# Altium PCB PCB Smart Garden.PcbDoc
Units mil, origin at the board's own origin, x right, y up, seen from the top; angles counter-clockwise.
Board outline 2320.55 x 3202.57 mil, 2 copper layers (Top Layer, Bottom Layer); 16 components, 47 nets, 98 pads, 24 vias.
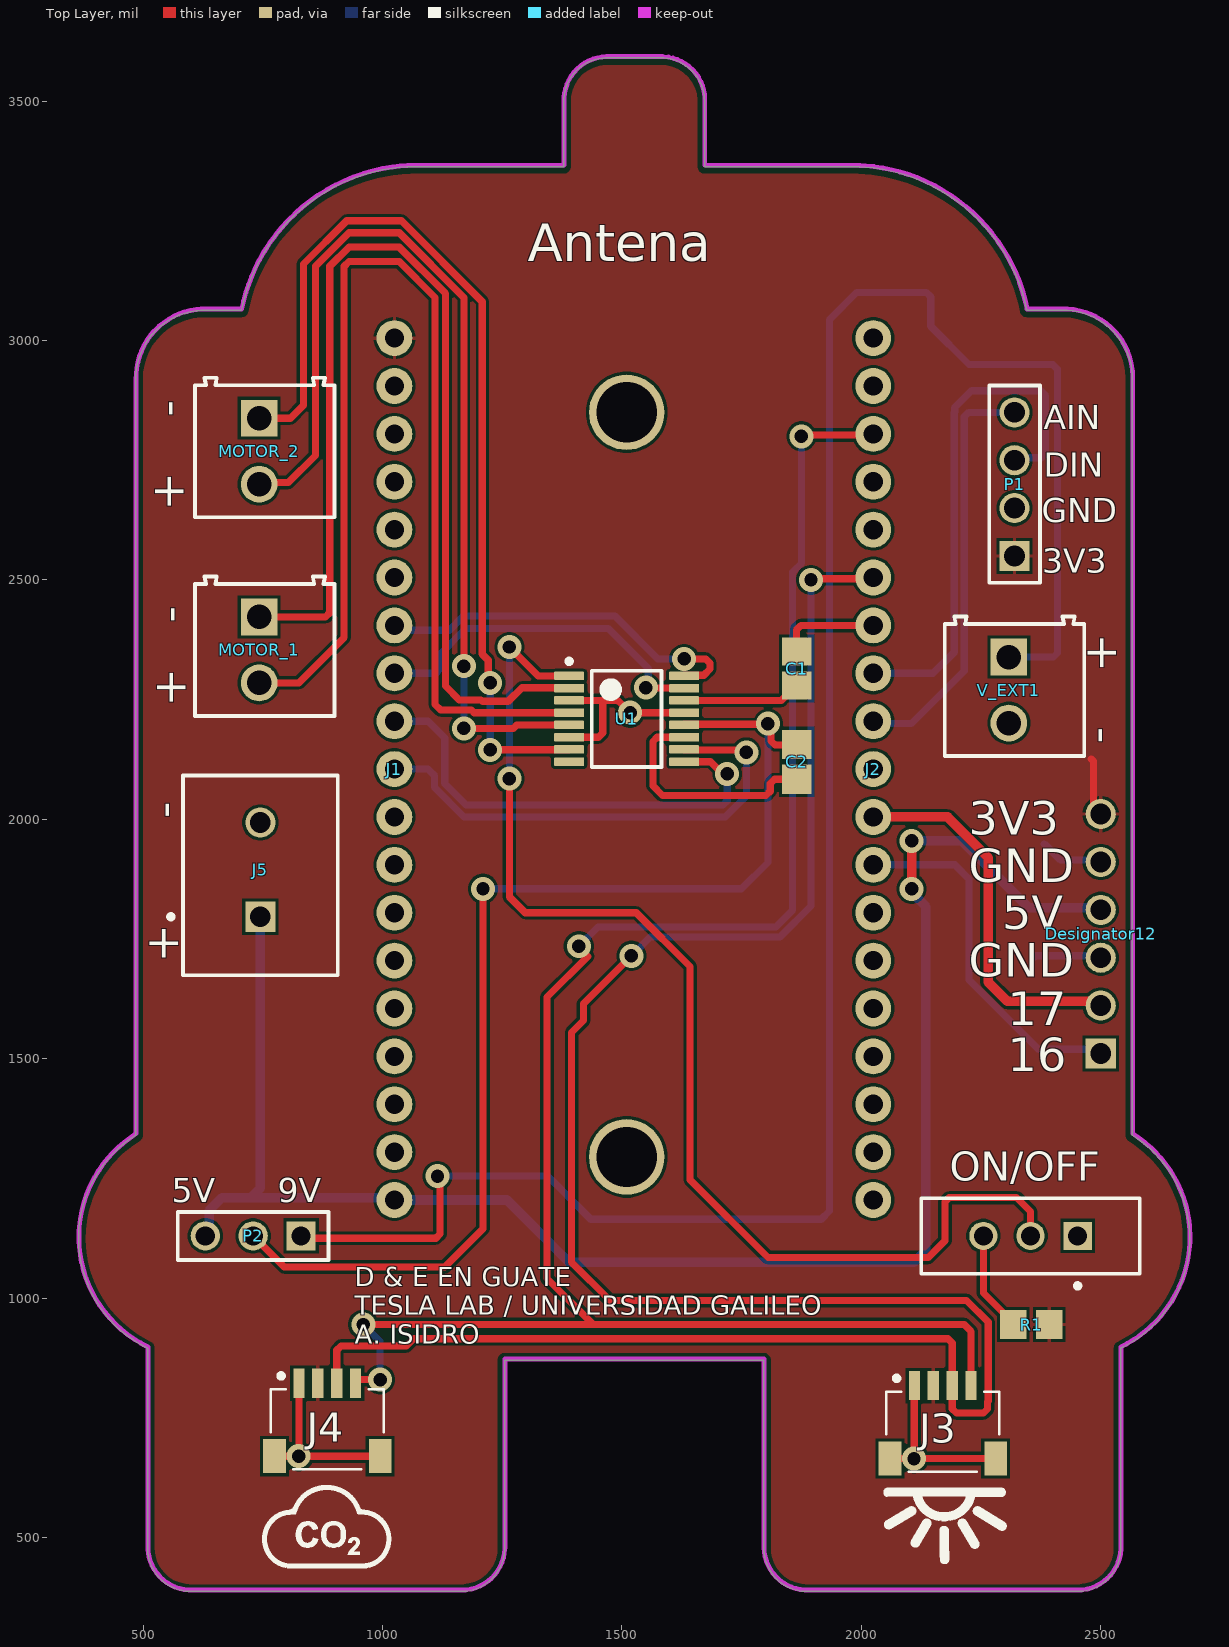
[diagram p0: Top Layer view]
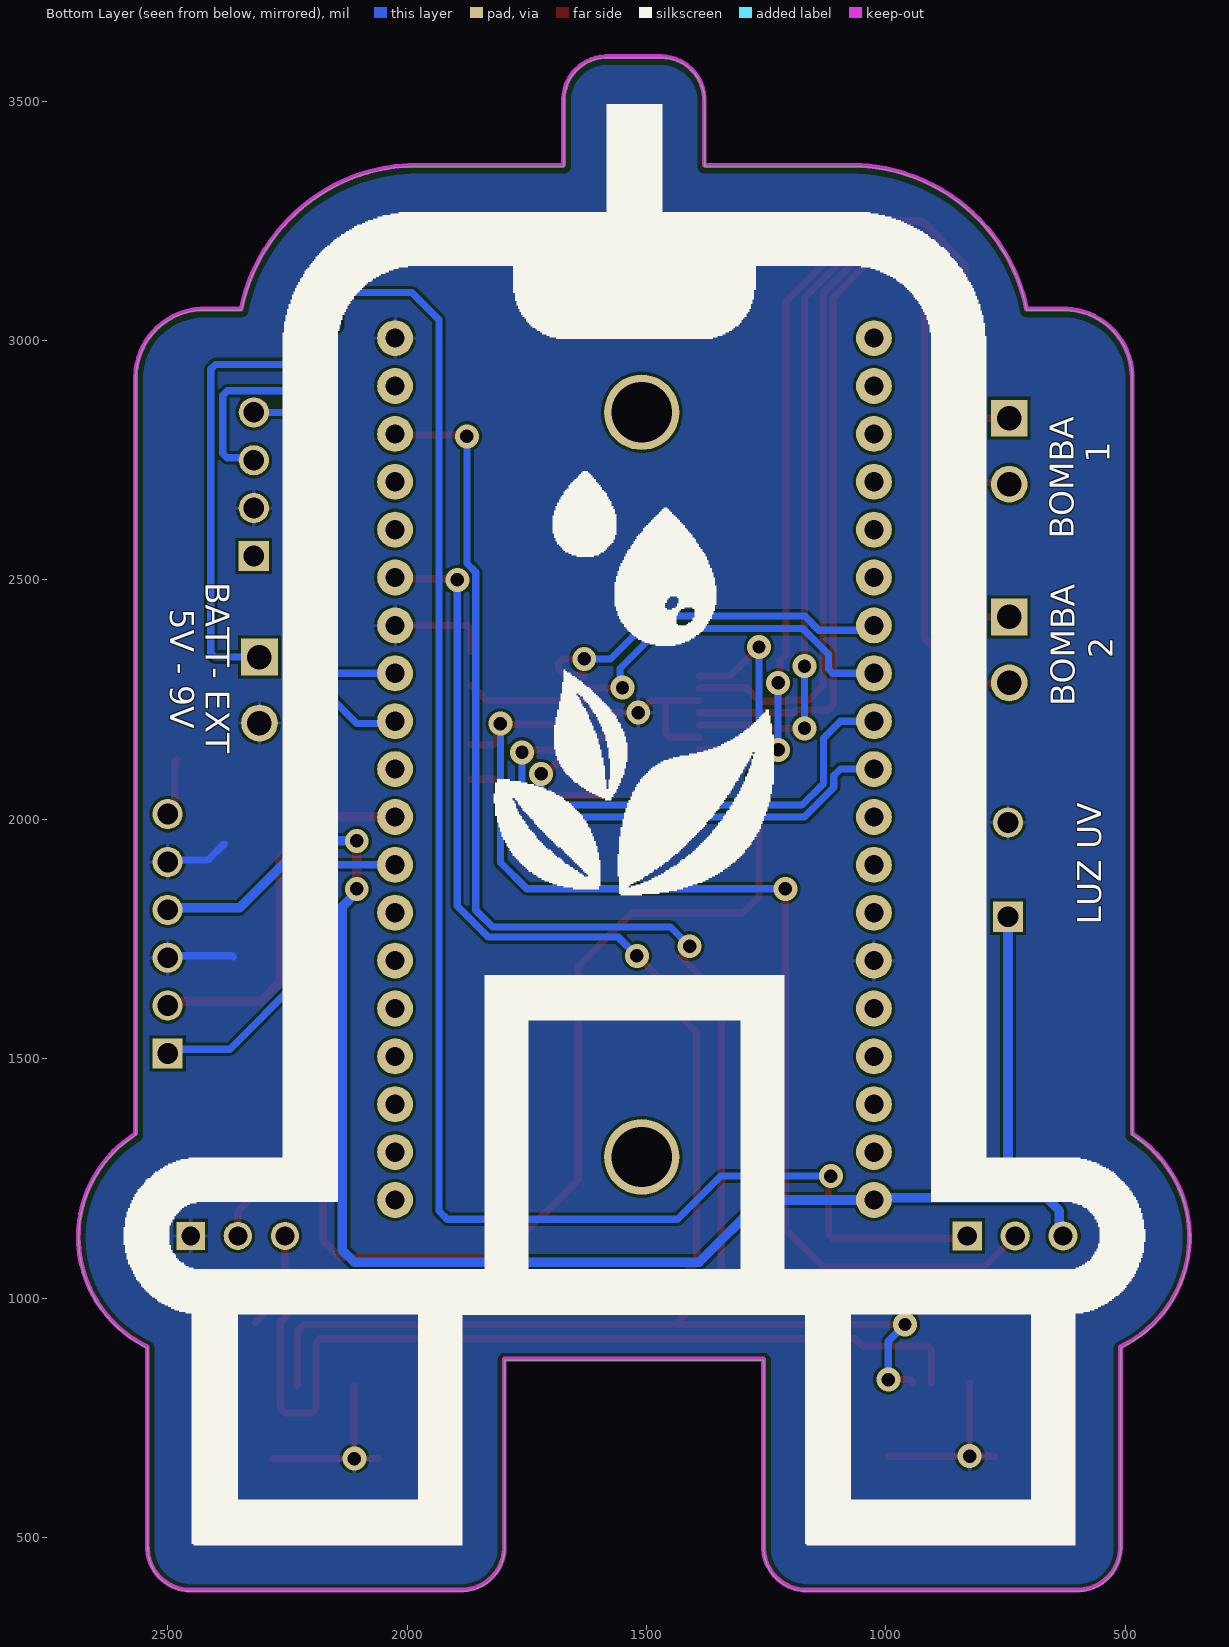
[diagram p1: Bottom Layer view, seen from below]
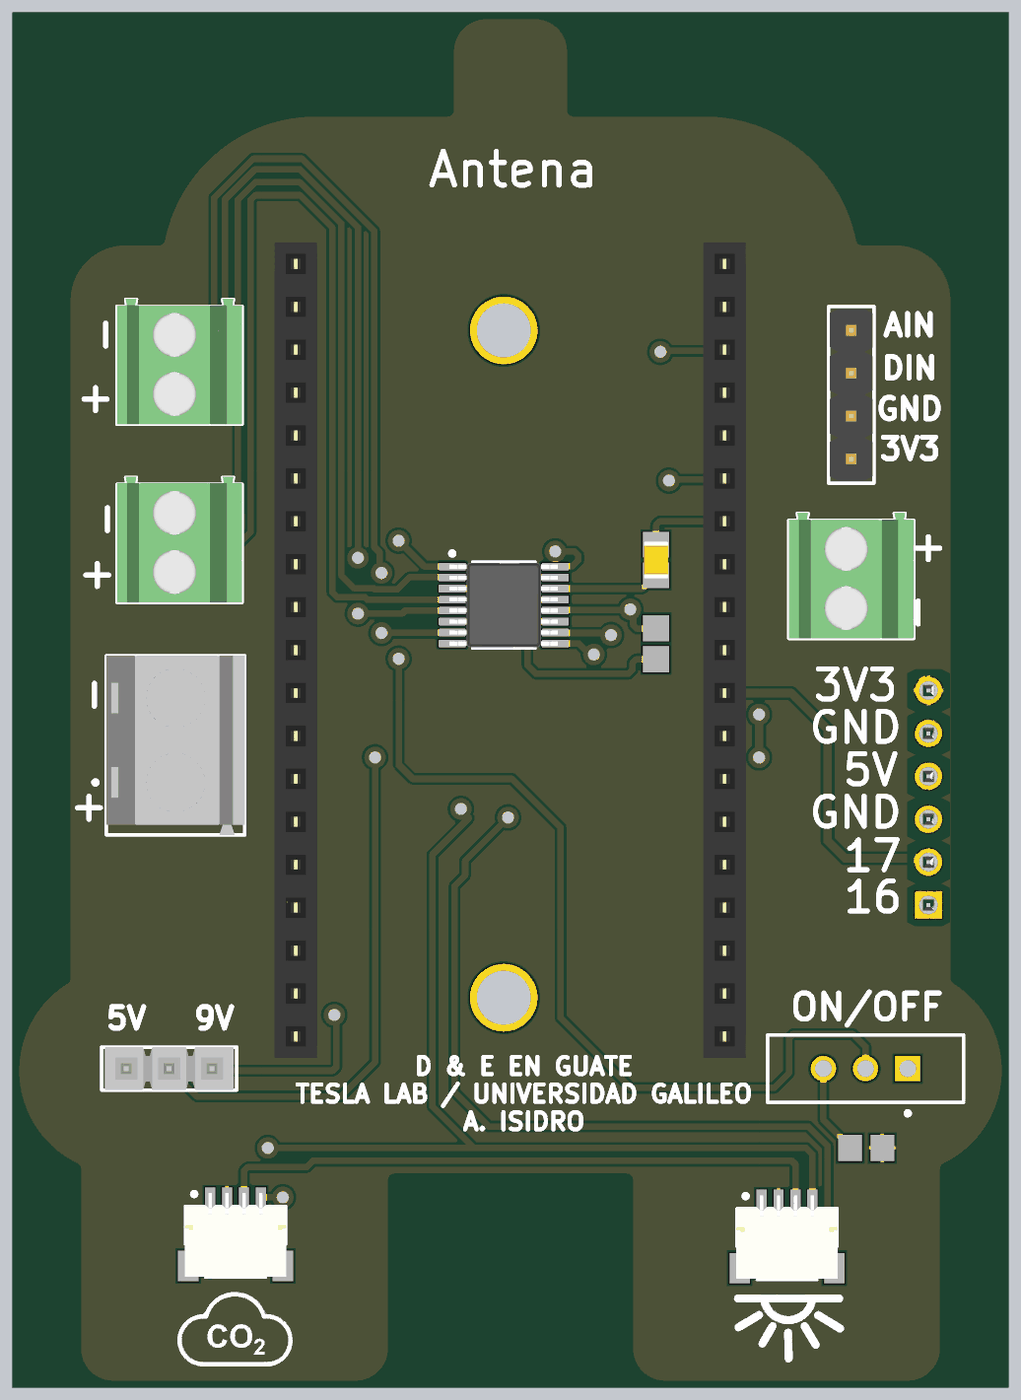
[diagram p2: 3D render of the assembled board from above, using the file's embedded part models]

## Layer stack, top to bottom
Top Solder: solder mask 0.4, Solder Resist, Dk 3.5
Top Layer: signal copper 1.4
Dielectric 1: dielectric 12.6, FR-4, Dk 4.8
Bottom Layer: signal copper 1.4
Bottom Solder: solder mask 0.4, Solder Resist, Dk 3.5

## Board outline
509.54,477.91 509.54,895.71 cw(c620.7,1125.58) 366.23,1104.66 cw(c621.18,1125.15) 365.41,1125.17 cw(c623.05,1125.16) 365.46,1130.33 cw(c621.18,1125.22) 366.23,1145.66 cw(c617.36,1125.59) 380.8,1212.26 cw(c618.41,1125.16) 398.82,1250.95 cw(c622.08,1122.87) 485,1340.72 485,2920 cw(c630.57,2920.01) 485.18,2927.31 cw(c628.24,2919.98) 610.69,3062.15 cw(c628.11,2919.27) 620.66,3063.01 cw(c628.2,2917.74) 628.21,3063.21 705.6,3063.21 cw(c1069.22,2990.28) 733.23,3147.28 cw(c1073.95,2987.82) 848.1,3288.67 cw(c1071.66,2991.55) 1020.34,3359.82 cw(c1071.81,2989.52) 1051.04,3362.81 cw(c1072.04,2985.63) 1072.07,3363.39 1378.71,3363.39 1378.71,3499.92 cw(c1470.47,3499.92) 1378.82,3504.53 cw(c1469,3499.91) 1457.94,3589.53 cw(c1468.93,3499.43) 1464.23,3590.08 cw(c1468.98,3498.52) 1468.98,3590.2 1582.39,3590.2 cw(c1582.39,3498.59) 1587,3590.08 cw(c1582.38,3499.9) 1672,3510.97 cw(c1581.96,3499.99) 1672.54,3504.68 cw(c1581,3499.93) 1672.67,3499.92 1672.67,3363.39 1979.29,3363.39 1985.25,3363.35 cw(c1979.36,2986.76) 2008.33,3362.28 cw(c1979.92,2992.42) 2115.25,3337.8 cw(c1977.64,2987.95) 2295.49,3188.71 cw(c1981.39,2990.05) 2345.77,3063.21 2423.16,3063.21 cw(c2423.16,2917.64) 2430.47,3063.03 cw(c2423.14,2919.97) 2565.3,2937.52 cw(c2422.42,2920.09) 2566.17,2927.55 cw(c2420.9,2920.01) 2566.36,2920 2566.36,1340.72 cw(c2429.14,1122.69) 2643.88,1265.01 cw(c2433.55,1125.49) 2683.83,1158.12 cw(c2431.9,1125.33) 2685.6,1138.7 cw(c2429.3,1125.18) 2685.96,1125.17 cw(c2429.78,1125.15) 2685.74,1114.72 cw(c2432.55,1124.96) 2674.94,1051.06 cw(c2430.32,1125.95) 2590.24,926.27 cw(c2431.15,1124.71) 2541.82,895.71 2541.82,477.91 cw(c2450.22,477.9) 2541.7,473.3 cw(c2451.52,477.92) 2462.59,388.3 cw(c2451.6,478.43) 2456.3,387.75 cw(c2451.54,479.45) 2451.54,387.63 1886.55,387.63 cw(c1886.54,479.39) 1881.94,387.75 cw(c1886.56,477.93) 1796.94,466.86 cw(c1887.08,477.85) 1796.39,473.15 cw(c1888.09,477.91) 1796.27,477.91 1796.27,870.42 1255.1,870.42 1255.1,477.91 cw(c1163.49,477.9) 1254.98,473.3 cw(c1164.8,477.92) 1175.86,388.3 cw(c1164.88,478.42) 1169.58,387.75 cw(c1164.82,479.45) 1164.82,387.63 599.82,387.63 cw(c599.81,479.39) 595.21,387.75 cw(c599.83,477.93) 510.21,466.86 cw(c600.35,477.85) 509.66,473.15 cw(c601.36,477.91)

## Design rules (kind name [scope] priority, off if disabled: settings)
BoardOutlineClearance [All] p1: gap=15 ignorepadtopadclearanceinfootprint=FALSE
Clearance [All] p1: gap=6 ignorepadtopadclearanceinfootprint=FALSE except(0: Arc-Hole Track-Hole SMDPad-Hole THPad-Hole Via-Hole Fill-Hole Poly-Hole Region-Hole Text-Hole)
ComponentClearance [All] p1: gap=1 collisioncheckmode=3 verticalgap=-30 showdistances=FALSE
DiffPairsRouting [All] p1: maxlimit=393.7 minlimit=6 mostfreqgap=8 toplayer_minwidth=6 toplayer_maxwidth=15 toplayer_prefwidth=8 bottomlayer_minwidth=6 bottomlayer_maxwidth=15 bottomlayer_prefwidth=8 maxuncoupledlength=500
HoleSize [All] p1: absolutevalues=TRUE maxlimit=265 minlimit=13 maxpercent=80.000 minpercent=20.000
HoleToHoleClearance [All] p1: gap=10 allowstackedmicrovias=FALSE
MinimumAnnularRing [All] p1: minimumring=7
MinimumSolderMaskSliver [All] p1: minsoldermaskwidth=0
PlaneClearance [All] p1: clearance=10
PlaneConnect [All] p1: planeconnectstyle=Direct reliefexpansion=16 reliefentries=4 reliefconductorwidth=6 reliefairgap=6
PolygonConnect [All] p1: connectstyle=Relief reliefconductorwidth=8 reliefentries=4 polygonreliefangle="90 Angle" airgapwidth=6
RoutingCorners [All] p1: cornerstyle=45-Degree minsetback=49.21 maxsetback=49.21
RoutingVias [All] p1: holewidth=15 width=30 viastyle="Through Hole" minholewidth=13 minwidth=27 maxholewidth=100 maxwidth=114
SilkToSilkClearance [All] p1: silktosilkclearance=0
SilkToSolderMaskClearance [IsPad] p1: minsilkscreentomaskgap=6 clearancetoexposedcopper=TRUE
SolderMaskExpansion [All] p1: expansion=2.95 istentingtop=FALSE
Width [All] p1: maxlimit=400 minlimit=6 preferedwidth=15
20 further rules are at their usual default settings.

## Classes and differential pairs
component class SM_Balam_22: a J1 J2 J4 J5 P1
component class BOMBA_AGUA: C1 C2 MOTOR_1 MOTOR_2 ON/OFF P2 R1 U1 V_EXT1

## Components (designator, comment, footprint, x,y, rotation, side; value= is the part's Value field where it differs from the comment)
C1 "0805ZD225KAT2A" CAPC2013X140X50ML20T25 1865,2315 r90 top
C2 "0.1 uF" CAPC2013X94X50ML20T25 1865,2120 r90 top
Designator12 "Comment" 61300611121 2500,1761.02 r90 top
J1 "PH1-19-UA" "PH1-19-UA - SOCKET" 1025,3005 r270 top locked
J2 "PH1-19-UA" "PH1-19-UA - SOCKET" 2025,3005 r270 top locked
J3 "SM04B-SRSS-TB(LF)(SN)" JST_SM04B-SRSS-TB(LF)(SN) 2170.24,817.56 r0 top
J4 "SM04B-SRSS-TB(LF)(SN)" JST_SM04B-SRSS-TB(LF)(SN) 884.76,822.56 r0 top
J5 "282836-2" TECO-282836-2_V 745,1895 r90 top
MOTOR_1 "691214110002" 691214110002 754.25,2353.9 r270 top
MOTOR_2 "691214110002" 691214110002 754.25,2768.78 r270 top
ON/OFF "EG1218" ESWI-EG1218_V 2353.43,1130 r180 top (schematic designator ON/OFF1)
P1 "61300411121" 61300411121 2320,2700 r90 top
P2 "TSW-103-07-F-S" SMTC-TSW-103-07-X-S 830,1130 r180 top
R1 "ERA6AEB473V" RESC2013X60X40ML20T25 2355,945 r0 top
U1 "DRV8833PW" PW0016A_M 1510,2210 r0 top
V_EXT1 "691214110002" 691214110002 2320,2270 r270 top

## Footprints (in the part's own frame and the unit in brackets; to place one, negate y for a bottom-side part, rotate by r counter-clockwise, add the part's x,y. Pads: shape width x height; smd on the part's side, far side on the other; paste and mask are expansions set on the pad)
61300411121 [mm] "Pin Header, pitch 2.54 mm, THT, Vertical, single row, 4p"
  rect 1.6x1.6 hole 1.1: 1(-3.81,0)
  round 1.6 hole 1.1: 2(-1.27,0) 3(1.27,0) 4(3.81,0)
  silkscreen extent -5.23,-1.35 5.23,1.35, body extent -5.08,-1.27 5.08,1.27, height 8.57
61300611121 [mm] "Pin Header, pitch 2.54 mm, THT, Vertical, single row, 6p"
  rect 1.6x1.6 hole 1.1: 1(-6.35,0)
  round 1.6 hole 1.1: 2(-3.81,0) 3(-1.27,0) 4(1.27,0) 5(3.81,0) 6(6.35,0)
  body extent -7.62,-1.27 7.62,1.27, height 8.57
691214110002 [mm] "3.50 mm Horizontal Entry Modular, 2p"
  rect 1.95x1.95 hole 1.3: 1(-1.75,-0.3)
  round 1.95 hole 1.3: 2(1.75,-0.3)
  silkscreen extent -3.9,-3.7 3.5,3.7, body extent -3.95,-3.7 3.5,3.7, height 8.55
CAPC2013X94X50ML20T25 [mm] "Chip Capacitor, 2-Leads, Body 2.01x1.25mm, IPC Low Density"
  rect 1.55x1.55 smd: 1(-0.925,0) 2(0.925,0)
  body extent -1.1,-0.72 1.11,0.72, height 0.94
CAPC2013X140X50ML20T25 [mm] "Chip Capacitor, 2-Leads, Body 2.2x1.45mm, IPC Low Density"
  rect 1.5x1.55 smd: 1(-0.9,0) 2(0.9,0)
  body extent -1.1,-0.72 1.1,0.72, height 1.4
ESWI-EG1218_V [mm] "THD, 3-Leads, Body 11.6x4mm, Pitch 2.5mm"
  rect 1.5x1.5 hole 1: 1(-2.5,0)
  round 1.5 hole 1: 2(0,0) 3(2.5,0)
  silkscreen extent -5.8,-2 5.8,2.77, body extent -5.8,-2 5.8,2, height 7.4
JST_SM04B-SRSS-TB(LF)(SN) [mm]
  rect 0.6x1.55 smd: 1(-1.5,0) 2(-0.5,0) 3(0.5,0) 4(1.5,0)
  rect 1.2x1.8 smd: S1(-2.8,-3.875) S2(2.8,-3.875)
  silkscreen extent -3,-4.57 3,0.48, body extent -3,-4.5 3,0.45, height 2.98
"PH1-19-UA - SOCKET" [mm] "Connector Header Through Hole 19 position 0.100\" (2.54mm)"
  round 1.905 hole 1.02: 1(0,0) 2(2.54,0) 3(5.08,0) 4(7.62,0) 5(10.16,0) 6(12.7,0) 7(15.24,0) 8(17.78,0) 9(20.32,0) 10(22.86,0) 11(25.4,0) 12(27.94,0) 13(30.48,0) 14(33.02,0) 15(35.56,0) 16(38.1,0) 17(40.64,0) 18(43.18,0) 19(45.72,0)
  body extent -1.27,-1.27 46.99,1.27, height 7
PW0016A_M [mm] "SOP, 16-Leads, Body 5.1x4.5mm, Pitch 0.65mm, IPC Low Density"
  rrect22% 1.6x0.45 smd: 1(-3.05,2.275) 2(-3.05,1.625) 3(-3.05,0.975) 4(-3.05,0.325) 5(-3.05,-0.325) 6(-3.05,-0.975) 7(-3.05,-1.625) 8(-3.05,-2.275) 9(3.05,-2.275) 10(3.05,-1.625) 11(3.05,-0.975) 12(3.05,-0.325) 13(3.05,0.325) 14(3.05,0.975) 15(3.05,1.625) 16(3.05,2.275)
  silkscreen extent -3.17,-2.55 1.85,3.17, body extent -3.21,-2.5 3.21,2.5, height 1
RESC2013X60X40ML20T25 [mm] "Chip Resistor, 2-Leads, Body 2.00x1.25mm, IPC Low Density"
  rect 1.4x1.55 smd: 1(-0.95,0) 2(0.95,0)
  body extent -1.1,-0.72 1.1,0.72, height 0.6
SMTC-TSW-103-07-X-S [mm] ".025 SQ Post Terminal Strip Assembly, 1x3 Pins, Vertical, 2.54mm Pitch, Male"
  rect 1.55x1.55 hole 1.02: 1(0,0)
  round 1.55 hole 1.02: 2(2.54,0) 3(5.08,0)
  silkscreen extent -1.46,-1.27 6.54,1.27, body extent -1.27,-1.27 6.35,1.27, height 8.38
TECO-282836-2_V [mm] "Female Header, Pitch 5mm, 1 x 2 Position, Height 10mm"
  rect 1.6x1.6 hole 1.1: 1(-2.5,0)
  round 1.6 hole 1.1: 2(2.5,0)
  silkscreen extent -5.6,-4.1 5,4.87, body extent -5.6,-4.1 5,4.1, height 10

## Part data
C1: library part CMP-2000-05810-1, "Chip Capacitor, 2.2 uF, +/- 10%, 10 V, -55 to 85 degC, 0805 (2012 Metric), RoHS, Tape and Reel", Capacitance=2.2µF, Case Size/Dimension=0805, Dielectric=X5R, Manufacturer=AVX, Package Description="2-Pin Surface Mount Device, Body 2.01 x 1.25 mm", Rated Voltage=10V, Tolerance (%)=±10%, Datasheet URL=http://datasheets.avx.com/cx5r.pdf, Datasheet Version=05/2016, Manufacturer URL=http://www.avx.com/, Mounting Technology=SurfaceMount, Package Reference=0805
C2: library part CMP-2000-05016-1, "Chip Capacitor, Ceramic, 0.1 uF, 10%, 50 V, 0805, RoHS, Tape and Reel", Capacitance=100nF, Case Size/Dimension=0805, Dielectric=X7R, Manufacturer=AVX, Rated Voltage=50V, Tolerance (%)=±10%, Datasheet URL=http://www.farnell.com/datasheets/319609.pdf, Datasheet Version=Sep-07, Manufacturer URL=http://www.avx.com/
J1 J2: "Connector Header Through Hole 19 position 0.100\" (2.54mm)", Supplier Part Number 1=2057-PH1-19-UA-ND, Supplier 1=Digi-Key
J3 J4: "Connector Header Surface Mount, Right Angle 4 position 0.039 _1.00mm_", Package=None, Availability=Unavailable, MF="JST Sales", MP=SM04B-SRSS-TB_LF__SN_, Price=None, SnapEDA_Link=https://www.snapeda.com/parts/SM04B-SRSS-TB%28LF%29%28SN%29/JST%20Sales%20America%20Inc./view-part/557466/?ref=snap
J5: library part CMP-1684-00017-1, "Female Header, Pitch 5 mm, 1 x 2 Position, Height 10 mm, Tail Length 3.5 mm, Rohs, Bulk", Color=Green, Current=13.5A, Manufacturer="TE Connectivity", Package Description="Female Header, Pitch 5 mm, 1 x 2 Position, Height 10 mm, Tail Length 3.5 mm", Package Reference=THD, Standard Package=300, Voltage=300V, 3D Model=282836-2.pdf, Category=Connectors,Interconnects, Clamp Material - Plating=Brass-NickelPlated, Contact Material - Plating=Brass-TinPlated, Datasheet URL=http://www.te.com.cn/commerce/DocumentDelivery/DDEController?Action=showdoc&DocId=Catalog+Section%7F1308389_EUROSTYLE_TERMINAL_BLOCKS%7F0607%7Fpdf%7FEnglish%7FENG_CS_1308389_EUROSTYLE_TERMINAL_BLOCKS_0607.pdf%7F282836-2, Dynamic Catalog=BuchananSeries, Family=TerminalBlocks-WiretoBoard, Featured Product=EurostyleTerminalBlockConnectors, Features=Interlocking(Side), Housing Material=Polyamide(PA66),Nylon6/6, Manufacturer URL=http://www.te.com, Mating Orientation=HorizontalwithBoard, Mounting Type=ThroughHole, Number of Levels=1, Other Names="5ULV-02B / A98076", Packaging=Bulk, Pitch="0.197\"(5.00mm)", Positions Per Level=2, Product Training Modules=Wire-to-BoardEurostyleTerminalBlocks, RoHS Information=282836-2StatementofCompliance, Screw Material - Plating=Brass-NickelPlated, Screw Thread=M3, Series=Buchanan, Torque - Screw=0.68Nm(6Lb-In), Wire Gauge=16-30AWG, Wire Termination=Screw-RisingCageClamp
MOTOR_1 MOTOR_2 V_EXT1: library part CMP-1502-02464-1, "Serie 2141 - 3.50 mm Horizontal Entry Modular with Rising Cage Clamp WR-TBL, 2 pin", Manufacturer="Wurth Elektronik", Operating Temperature=-40to105degC, Datasheet URL=http://katalog.we-online.de/em/datasheet/6912141100xx.pdf, Manufacturer URL=http://www.we-online.de, Mounting Technology=THT, Package Reference=691214110002, Packaging=Box, Part Number=691214110002, Pin Number=2, Pitch=3.50mm, Publisher=WurthElektronik
ON/OFF: library part CMP-1696-00002-1, "Slide Switch, 500 V, -20 to 70 degC, 3-Pin THD, RoHS", Case\Package=SOT-23-5, Dropout Voltage="300 mV", Max Input Voltage="8 V", Max Operating Temperature="85 degC", Max Ouput Current="150 mA", Max Power Dissipation="250 mW", Min Input Voltage="4.3 V", Min Operating Temperature="-40 degC", Nominal Output Voltage="3.3 V", Package Quantity=3000, ComponentLink1Description="Manufacturer URL", ComponentLink1URL=http://www.e-switch.ch/en/, ComponentLink2Description=Datasheet, ComponentLink2URL=https://www.e-switch.com/system/asset/product_line/data_sheet/119/EG.pdf, DatasheetVersion=Oct-15, Height="1.3 mm", Length="3 mm", Mount="Surface Mount", Output Current="150 mA", Output Voltage="3.3 V", Outputs=1, PackageDescription="3-Pin Through Hole Device, Body 11.6 x 4 mm, Pitch 2.5 mm", PackageReference=EG1218, Packaging="Tape and Reel", Pins=5, Power Rating="250 mW", Radiation Hardening=No, REACH SVHC="No SVHC", RoHSCompliant=true, Width="1.8 mm"
P1: library part CMP-1502-01064-1, "THT Vertical Pin Header WR-PHD, Pitch 2.54 mm, Single Row, 4 pins", Contact Resistance=20mOhm, Manufacturer="Wurth Elektronik", Operating Temperature=-40to105degC, Rated Current=3A, Withstanding Voltage=500VAC, Working Voltage=250VAC, Datasheet URL=https://katalog.we-online.de/em/datasheet/6130xx11121.pdf, Gender=Male, Manufacturer URL=http://www.we-online.de, Mounting Technology=THT, Orientation=Vertical, Package Reference=61300411121, Packaging=Bag, Part Number=61300411121, Pin Number=4, Pitch=2.54mm, Publisher=WurthElektronik, Row Number=Single
P2: library part CMP-1024-00331-1, "0.025\" SQ Post Header, Through-hole, Vertical, -55 to 125 degC, 2.54 mm Pitch, 3-Pin, Male, RoHS", Manufacturer=Samtec, Temperature Range="-55 to 125 degC", ComponentLink1Description="Manufacturer URL", ComponentLink1URL=http://www.samtec.com, ComponentLink2Description=Datasheet, ComponentLink2URL=http://www.samtec.com/documents/webfiles/pdf/TSW_TH.PDF, ComponentLink3Description="Package Specification", ComponentLink3URL=http://www.samtec.com/documents/webfiles/cpdf/TSW-XXX-XX-XXX-X-XX-XXX-MKT.pdf, DatasheetVersion=F-214, Mounting Technology=Through-hole, Orientation=Vertical, PackageDescription=".025[0.64] SQ. Post Terminal Strip Assembly", PackageReference=TSW-103-07-X-S, PackageVersion="DM, 8/1988", PartNumber=TSW-103-07-F-S, Pitch="2.54 mm", RoHS=True
R1: library part CMP-2001-00645-1, Manufacturer=Panasonic, Part Number=ERA6AEB473V
U1: library part CMP-1529-00002-2, "2 A Low Voltage Dual Brushed DC or Single Bipolar Stepper Motor Driver (PWM Ctrl), 2.7 to 10.8 V, -40 to 85 degC, 16-Pin SOP (PW), Green (RoHS & no Sb/Br), Tube", Manufacturer="Texas Instruments", Package Reference=PW0016A, Peak Output Current="2 A", RMS Output Current="1.5 A", Temperature Range="-40 to 85 degC", ComponentLink1Description="Manufacturer URL", ComponentLink1URL=www.ti.com, ComponentLink2Description=Datasheet, ComponentLink2URL=http://www.ti.com/lit/ds/symlink/drv8833.pdf, ComponentLink3Description="Package Specification", ComponentLink3URL=http://www.ti.com/lit/ml/mpds361/mpds361.pdf, Control I/F=PWM, DatasheetVersion=SLVSAR1D, Eco-Plan="Green (RoHS & no Sb/Br)", Mounting Technology="Surface Mount", PackageDescription="16-Pin Plastic Small Outline, Body 4.4 x 5 mm, Pitch 0.65 mm", PackageVersion=4040064-4/G, Packing=Tube, PartNumber=DRV8833PW, rDS (ON) (LS + HS)="360 mOhms", Vs="2.7 V Min."

## Free pads (board coordinates)
  round 157.48 hole 125.98 paste+0: 5V(1510,1295) 5V(1510,2850)

## Via types
v1: diameter 50, hole 28, Top Layer to Bottom Layer, tented both sides, 24 vias

## Nets (pads, with @x,y where several pads share a name; then routed paths per layer and width w, separated by ;. In a path a pad name is that pad's centre, name@x,y a point inside that pad or via, vN(x,y) a via of type N, cw(c..) or ccw(c..) an arc to the next point about the centre after c; other vN are vias at no path point)
3V3: Designator12.6 J1.1 J3.2 J4.2 P1.1 R1.2 | length 107.9
  Top Layer w15: 2480.32,2125.98 2485,2121.3 Designator12.6@2485,2020
5V: Designator12.4 J1.19 J5.1 P2.3 | length 3531
  Top Layer w20: v1(2105,1855) v1(2105,1955)
  Bottom Layer w20: P2.3 638.01,1138.01 638.01,1183.01 665,1210 725,1210 ; J5.1 745,1230 725,1210 ; v1(2105,1855) 2105,1847.82 2135,1817.82 2135,1100 2110,1075 1390,1075 1260,1205 J1.19 1020,1210 725,1210 ; v1(2105,1955) 2210,1955 2350,1815 Designator12.4@2485,1815
aHigro: J2.9 P1.4 | length 877.5
  Bottom Layer w15: J2.9 2030,2200 2105,2200 2215,2310 2215,2841.21 2223.79,2850 P1.4
AIN_1: J1.7 U1.16 | length 788.3
  Top Layer w15: v1(1630,2335) 1675,2335 1683.79,2326.21 1683.79,2313.79 1670.93,2300.93 1631.44,2300.93 U1.16
  Bottom Layer w15: J1.7 1035,2395 1140,2395 1170,2425 1485,2425 1575,2335 v1(1630,2335)
AIN_2: J1.8 U1.15 | length 744.2
  Top Layer w15: v1(1550,2275) 1550.51,2274.49 1629.57,2274.49 U1.15
  Bottom Layer w15: J1.8 1111.21,2305 1120,2313.79 1120,2345 1173.5,2398.5 1471.5,2398.5 1555,2315 1555,2280 v1(1550,2275)
BIN_1: J1.9 U1.9 | length 983.4
  Top Layer w15: U1.9 1685.1,2120.43 1710.53,2095 v1(1720,2095)
  Bottom Layer w15: J1.9 1095,2205 1130,2170 1130,2075 1175,2030 1711.21,2030 1720,2038.79 v1(1720,2095)
BIN_2: J1.10 U1.10 | length 1032.5
  Top Layer w15: U1.10 1631.1,2145 1755,2145 v1(1760,2140)
  Bottom Layer w15: J1.10 1095,2105 1099.99,2100.01 1109,2091 1109,2066.3 1170.3,2005 1715.91,2005 1760,2049.09 v1(1760,2140)
CLK: J2.19
CMD: J1.18
dHigro: J2.8 P1.3 | length 1103.3
  Bottom Layer w15: J2.8 2150,2305 2194,2349 2194,2849.91 2195,2850.91 2195,2860 2230,2895 2375,2895 2385,2885 2385,2763.79 2376.21,2755 2335,2755 2325,2745 P1.3
EN: J1.2
GND: C1.2 Designator12.3 Designator12.5 J1.14 J2.1 J2.7 J3.1 J3.S1 J3.S2 J4.1 J4.S1 J4.S2 J5.2 ON/OFF.1 P1.2 U1.3 U1.6 U1.13 V_EXT1.2 | length 1589.6
  Top Layer w15: J4.S1 v1(825,670) ; J4.1 825.71,670.71 v1(825,670) ; J4.S2 v1(825,670) ; U1.6 1451.21,2171.61 1460,2180.4 1460,2248.39 ; U1.3 1460,2248.39 ; U1.13 v1(1517.2,2222.8) 1499.99,2240.01 1491.61,2248.39 1460,2248.39 ; C1.2 1865,2396.21 1873.79,2405 J2.7 ; J3.S1 v1(2110,665) ; J3.1 2110.59,816.97 2110.59,665.59 v1(2110,665) ; J3.S2 v1(2110,665)
  Bottom Layer w15: 2362.2,1712.6 2364.61,1715 Designator12.3@2485,1715 ; 2381.89,1948.82 2415.71,1915 Designator12.5@2485,1915
IO0: J2.14
IO2: J2.15
IO4: J2.13
IO5: J2.10
IO13: J1.15
IO15: J2.16
IO16: Designator12.1 J2.12 | length 761.2
  Bottom Layer w15: J2.12 2195,1905 2225,1875 2225,1665 2370,1520 2491.02,1520 Designator12.1
IO17: Designator12.2 J2.11 | length 773
  Top Layer w20: J2.11 2180,2005 2265,1920 2265,1660 2305,1620 Designator12.2@2486.26,1620
IO23: J2.2
IO27: J1.11
IO34: J1.5
IO35: J1.6
MOTOR_V: C2.2 P2.2 U1.12 | length 2430.4
  Top Layer w15: P2.2 795,1065 1130,1065 1210,1145 v1(1210,1855) ; U1.12 1631.44,2198.56 1803.56,2198.56 v1(1805,2200) 1811.7,2193.3 1811.7,2163.79 1820.48,2155 1863.58,2155 C2.2
  Bottom Layer w15: v1(1210,1855) 1750,1855 1805,1910 v1(1805,2200)
NetC1_1: C1.1 U1.14 | length 247.8
  Top Layer w15: U1.14 1832.83,2248.39 1864.02,2279.57 C1.1
NetC2_1: C2.1 U1.11 | length 493.1
  Top Layer w15: U1.11 1573.79,2171.61 1565,2162.83 1565,2070 1585,2050 1801.21,2050 1810,2058.79 1810,2074.8 1818.79,2083.58 C2.1
NetD1_1: 
NetMOTOR_1_1: MOTOR_1.1 U1.2 | length 2276.6
  Top Layer w15: MOTOR_1.1 881.21,2422.8 890,2431.58 890,3155 930,3195 1035,3195 1131.5,3098.5 1131.5,2278.5 1160.5,2249.5 1206.05,2249.5 1209.05,2246.5 1262.7,2246.5 1291.2,2275 1388.9,2275 U1.2
NetMOTOR_1_2: MOTOR_1.2 U1.4 | length 2354.2
  Top Layer w15: MOTOR_1.2 825,2285 920,2380 920,3155 930,3165 1035,3165 1110,3090 1110,2240 1121.5,2228.5 1185.95,2228.5 1191.65,2222.8 U1.4
NetMOTOR_2_1: MOTOR_2.1 U1.7 | length 1987.8
  Top Layer w15: MOTOR_2.1 807.68,2837.68 835,2865 835,3159.7 925.3,3250 1039.7,3250 1208.5,3081.2 1208.5,2345 1221,2332.5 1221,2289 v1(1225,2285) ; v1(1225,2145) 1225.51,2145.51 1389.41,2145.51 U1.7
  Bottom Layer w15: v1(1225,2145) v1(1225,2285)
NetMOTOR_2_2: MOTOR_2.2 U1.5 | length 2055.3
  Top Layer w15: MOTOR_2.2 745.89,2703.33 803.33,2703.33 860,2760 860,3155 930,3225 1035,3225 1170,3090 v1(1170,2320) ; v1(1170,2190) 1273.12,2190 1280.33,2197.2 U1.5
  Bottom Layer w15: v1(1170,2190) v1(1170,2320)
NetON/OFF1_2: ON/OFF.2 U1.1 | length 2495.1
  Top Layer w15: v1(1265,2085) 1265,1838.15 1298.15,1805 1530,1805 1642.5,1692.5 1642.5,1247.5 1805,1085 2140,1085 2175,1120 2175,1201.21 2183.79,1210 2324.25,1210 2353.43,1180.83 ON/OFF.2 ; v1(1265,2360) 1325.43,2299.57 U1.1
  Bottom Layer w15: v1(1265,2085) v1(1265,2360)
NetON/OFF1_3: ON/OFF.3 R1.1 | length 208
  Top Layer w15: ON/OFF.3 2255,1010.55 R1.1@2317.6,947.95
PWM_A: J1.13
PWM_B: J1.12
RXD0: J2.5
SCK/SCL: J2.3 J3.4 J4.4 | length 4073.9
  Top Layer w15: J4.4 943.82,825.69 948.13,830 v1(995,830) ; v1(960,945) 1440,945 ; v1(1410,1735) 1410,1732.57 1428.79,1713.79 1343.79,1628.79 1343.79,1041.21 1440,945 ; v1(1875,2800) 1877.5,2802.5 2022.5,2802.5 J2.3 ; J3.4 2229.29,930.71 2215,945 1440,945
  Bottom Layer w15: v1(960,945) 995,910 v1(995,830) ; v1(1410,1735) 1450,1775 1821.21,1775 1856.5,1810.29 1856.5,2515.95 1875,2534.45 v1(1875,2800)
SD0: J2.18
SD1: J2.17
SD2: J1.16
SD3: J1.17
SDI/SDA: J2.6 J3.3 J4.3 | length 4612.8
  Top Layer w15: J4.3 904.45,891.21 913.24,900 1049.86,900 1065,915.14 2181.13,915.14 2189.92,906.36 J3.3 2189.92,768.79 2198.71,760 2255,760 2263.79,768.79 2263.79,783.79 2265,785 2265,950 2220,995 1475,995 1395,1075 1395,1555 1420,1580 1420,1615 v1(1520,1715) ; v1(1895,2500) 1897.5,2502.5 2022.5,2502.5 J2.6
  Bottom Layer w15: v1(1520,1715) 1559,1754 1829.91,1754 1895,1819.09 v1(1895,2500)
TXD0: J2.4
V_EXT: P2.1 V_EXT1.1 | length 4442.9
  Top Layer w15: P2.1 835,1125 1111.21,1125 1120,1133.79 1120,1250 v1(1115,1255)
  Bottom Layer w15: v1(1115,1255) 1345,1255 1435,1165 1916.21,1165 1933.5,1182.29 1933.5,3043.5 1990,3100 2136.21,3100 2145,3091.21 2145,3030 2225,2950 2400,2950 2410,2940 2410,2347.68 2401.21,2338.9 V_EXT1.1
VN: J1.4
VP: J1.3
pads on no net: U1.8

## Polygon pours and split planes (outlines as drawn)
GND on Bottom Layer "NONET_L-01_P-001" (solid, pour order 0): 509.54,477.91 509.54,895.71 cw(c620.7,1125.58) 366.23,1104.66 cw(c621.18,1125.15) 365.41,1125.17 cw(c623.05,1125.16) 365.46,1130.33 cw(c621.18,1125.22) 366.23,1145.66 cw(c617.36,1125.59) 380.8,1212.26 cw(c618.41,1125.16) 398.82,1250.95 cw(c622.08,1122.87) 485,1340.72 485,2920 cw(c630.57,2920.01) 485.18,2927.31 cw(c628.24,2919.98) 610.69,3062.15 cw(c628.11,2919.27) 620.66,3063.01 cw(c628.2,2917.74) 628.21,3063.21 705.6,3063.21 cw(c1069.22,2990.28) 733.23,3147.28 cw(c1073.95,2987.82) 848.1,3288.67 cw(c1071.66,2991.55) 1020.34,3359.82 cw(c1071.81,2989.52) 1051.04,3362.81 cw(c1072.04,2985.63) 1072.07,3363.39 1378.71,3363.39 1378.71,3499.92 cw(c1470.47,3499.92) 1378.82,3504.53 cw(c1469,3499.91) 1457.94,3589.53 cw(c1468.93,3499.43) 1464.23,3590.08 cw(c1468.98,3498.52) 1468.98,3590.2 1582.39,3590.2 cw(c1582.39,3498.59) 1587,3590.08 cw(c1582.38,3499.9) 1672,3510.97 cw(c1581.96,3499.99) 1672.54,3504.68 cw(c1581,3499.93) 1672.67,3499.92 1672.67,3363.39 1979.29,3363.39 1985.25,3363.35 cw(c1979.36,2986.76) 2008.33,3362.28 cw(c1979.92,2992.42) 2115.25,3337.8 cw(c1977.64,2987.95) 2295.49,3188.71 cw(c1981.39,2990.05) 2345.77,3063.21 2423.16,3063.21 cw(c2423.16,2917.64) 2430.47,3063.03 cw(c2423.14,2919.97) 2565.3,2937.52 cw(c2422.42,2920.09) 2566.17,2927.55 cw(c2420.9,2920.01) 2566.36,2920 2566.36,1340.72 cw(c2429.14,1122.69) 2643.88,1265.01 cw(c2433.55,1125.49) 2683.83,1158.12 cw(c2431.9,1125.33) 2685.6,1138.7 cw(c2429.3,1125.18) 2685.96,1125.17 cw(c2429.78,1125.15) 2685.74,1114.72 cw(c2432.55,1124.96) 2674.94,1051.06 cw(c2430.32,1125.95) 2590.24,926.27 cw(c2431.15,1124.71) 2541.82,895.71 2541.82,477.91 cw(c2450.22,477.9) 2541.7,473.3 cw(c2451.52,477.92) 2462.59,388.3 cw(c2451.6,478.43) 2456.3,387.75 cw(c2451.54,479.45) 2451.54,387.63 1886.55,387.63 cw(c1886.54,479.39) 1881.94,387.75 cw(c1886.56,477.93) 1796.94,466.86 cw(c1887.08,477.85) 1796.39,473.15 cw(c1888.09,477.91) 1796.27,477.91 1796.27,870.42 1255.1,870.42 1255.1,477.91 cw(c1163.49,477.9) 1254.98,473.3 cw(c1164.8,477.92) 1175.86,388.3 cw(c1164.88,478.42) 1169.58,387.75 cw(c1164.82,479.45) 1164.82,387.63 599.82,387.63 cw(c599.81,479.39) 595.21,387.75 cw(c599.83,477.93) 510.21,466.86 cw(c600.35,477.85) 509.66,473.15 cw(c601.36,477.91)
3V3 on Top Layer "NONET_L-01_P-001" (solid, pour order 1): 509.54,477.91 509.54,895.71 cw(c620.7,1125.58) 366.23,1104.66 cw(c621.18,1125.15) 365.41,1125.17 cw(c623.05,1125.16) 365.46,1130.33 cw(c621.18,1125.22) 366.23,1145.66 cw(c617.36,1125.59) 380.8,1212.26 cw(c618.41,1125.16) 398.82,1250.95 cw(c622.08,1122.87) 485,1340.72 485,2920 cw(c630.57,2920.01) 485.18,2927.31 cw(c628.24,2919.98) 610.69,3062.15 cw(c628.11,2919.27) 620.66,3063.01 cw(c628.2,2917.74) 628.21,3063.21 705.6,3063.21 cw(c1069.22,2990.28) 733.23,3147.28 cw(c1073.95,2987.82) 848.1,3288.67 cw(c1071.66,2991.55) 1020.34,3359.82 cw(c1071.81,2989.52) 1051.04,3362.81 cw(c1072.04,2985.63) 1072.07,3363.39 1378.71,3363.39 1378.71,3499.92 cw(c1470.47,3499.92) 1378.82,3504.53 cw(c1469,3499.91) 1457.94,3589.53 cw(c1468.93,3499.43) 1464.23,3590.08 cw(c1468.98,3498.52) 1468.98,3590.2 1582.39,3590.2 cw(c1582.39,3498.59) 1587,3590.08 cw(c1582.38,3499.9) 1672,3510.97 cw(c1581.96,3499.99) 1672.54,3504.68 cw(c1581,3499.93) 1672.67,3499.92 1672.67,3363.39 1979.29,3363.39 1985.25,3363.35 cw(c1979.36,2986.76) 2008.33,3362.28 cw(c1979.92,2992.42) 2115.25,3337.8 cw(c1977.64,2987.95) 2295.49,3188.71 cw(c1981.39,2990.05) 2345.77,3063.21 2423.16,3063.21 cw(c2423.16,2917.64) 2430.47,3063.03 cw(c2423.14,2919.97) 2565.3,2937.52 cw(c2422.42,2920.09) 2566.17,2927.55 cw(c2420.9,2920.01) 2566.36,2920 2566.36,1340.72 cw(c2429.14,1122.69) 2643.88,1265.01 cw(c2433.55,1125.49) 2683.83,1158.12 cw(c2431.9,1125.33) 2685.6,1138.7 cw(c2429.3,1125.18) 2685.96,1125.17 cw(c2429.78,1125.15) 2685.74,1114.72 cw(c2432.55,1124.96) 2674.94,1051.06 cw(c2430.32,1125.95) 2590.24,926.27 cw(c2431.15,1124.71) 2541.82,895.71 2541.82,477.91 cw(c2450.22,477.9) 2541.7,473.3 cw(c2451.52,477.92) 2462.59,388.3 cw(c2451.6,478.43) 2456.3,387.75 cw(c2451.54,479.45) 2451.54,387.63 1886.55,387.63 cw(c1886.54,479.39) 1881.94,387.75 cw(c1886.56,477.93) 1796.94,466.86 cw(c1887.08,477.85) 1796.39,473.15 cw(c1888.09,477.91) 1796.27,477.91 1796.27,870.42 1255.1,870.42 1255.1,477.91 cw(c1163.49,477.9) 1254.98,473.3 cw(c1164.8,477.92) 1175.86,388.3 cw(c1164.88,478.42) 1169.58,387.75 cw(c1164.82,479.45) 1164.82,387.63 599.82,387.63 cw(c599.81,479.39) 595.21,387.75 cw(c599.83,477.93) 510.21,466.86 cw(c600.35,477.85) 509.66,473.15 cw(c601.36,477.91)

## Keep-outs
Keep-Out Layer:
  lines w10: 365.97,1127.91 cw(c623.61,1127.92) 366.02,1133.08 cw(c621.67,1127.97) 366.79,1148.41 cw(c617.92,1128.34) 381.37,1215.01 cw(c618.98,1127.9) 399.38,1253.7 cw(c622.64,1125.62) 485.56,1343.47 485.56,2922.75 cw(c631.13,2922.76) 485.75,2930.06 cw(c628.8,2922.73) 611.25,3064.9 cw(c628.68,2921.92) 621.23,3065.76 cw(c628.76,2920.41) 628.77,3065.96 706.16,3065.96 cw(c1069.78,2993.03) 733.79,3150.03 cw(c1074.51,2990.57) 848.67,3291.42 cw(c1072.23,2994.3) 1020.9,3362.57 cw(c1072.38,2992.18) 1051.6,3365.56 cw(c1072.61,2988.25) 1072.63,3366.14 1379.27,3366.14 1379.27,3502.67 cw(c1471.03,3502.67) 1379.39,3507.28 cw(c1469.57,3502.66) 1458.5,3592.28 cw(c1469.49,3502.15) 1464.79,3592.83 cw(c1469.54,3501.2) 1469.55,3592.95 1582.95,3592.95 cw(c1582.95,3501.18) 1587.56,3592.83 cw(c1582.94,3502.65) 1672.56,3513.72 cw(c1582.43,3502.73) 1673.11,3507.43 cw(c1581.48,3502.67) 1673.23,3502.67 1673.23,3366.14 1979.86,3366.14 1985.81,3366.09 cw(c1979.92,2989.48) 2008.89,3365.03 cw(c1980.48,2995.17) 2115.81,3340.55 cw(c1978.2,2990.7) 2296.05,3191.46 cw(c1981.95,2992.8) 2346.33,3065.96 2423.72,3065.96 cw(c2423.73,2920.39) 2431.03,3065.77 cw(c2423.7,2922.72) 2565.87,2940.27 cw(c2422.89,2922.84) 2566.73,2930.29 cw(c2421.38,2922.76) 2566.93,2922.75 2566.93,1343.47 cw(c2429.7,1125.44) 2644.44,1267.76 cw(c2434.11,1128.24) 2684.39,1160.87 cw(c2432.37,1128.07) 2686.16,1141.45 cw(c2429.72,1127.93) 2686.52,1127.91 cw(c2430.1,1127.91) 2686.31,1117.47 cw(c2433.11,1127.71) 2675.5,1053.81 cw(c2430.88,1128.7) 2590.8,929.02 cw(c2431.71,1127.46) 2542.38,898.46 2542.38,480.66 cw(c2450.62,480.65) 2542.27,476.05 cw(c2452.08,480.67) 2463.15,391.05 cw(c2452.16,481.18) 2456.86,390.5 cw(c2452.11,482.13) 2452.1,390.38 1887.11,390.38 cw(c1887.11,482.14) 1882.5,390.5 cw(c1887.12,480.68) 1797.5,469.61 cw(c1887.63,480.6) 1796.95,475.9 cw(c1888.58,480.65) 1796.83,480.66 1796.83,873.17 1255.66,873.17 1255.66,480.66 cw(c1163.89,480.65) 1255.54,476.05 cw(c1165.36,480.67) 1176.43,391.05 cw(c1165.44,481.18) 1170.14,390.5 cw(c1165.39,482.13) 1165.38,390.38 600.38,390.38 cw(c600.38,482.14) 595.77,390.5 cw(c600.39,480.68) 510.77,469.61 cw(c600.9,480.6) 510.22,475.9 cw(c601.85,480.65) 510.1,480.66 510.1,898.46 cw(c621.27,1128.33) 366.79,1107.41 cw(c621.76,1127.9) 365.97,1127.91

## Silkscreen, mask and mechanical layers (free items; w line width, h text height)
Top Overlay:
  drawing of 10 lines, arcs and shapes, not listed
  text "Antena" at 1303.53,3166 h78.74
  text "-" at 585,2875.33 h70 r90
  text "AIN" at 2381.52,2815 h50
  text "+" at 585,2725.33 h70 r90
  text "DIN" at 2381.35,2715 h50
  text "GND" at 2377.35,2620 h50
  text "3V3" at 2378.35,2515 h50
  text "-" at 589,2445.33 h70 r90
  text "+" at 589,2315.33 h70 r90
  text "+" at 2472.93,2307.37 h70 r270
  text "-" at 2472.93,2157.37 h70 r270
  text "-" at 578,2036.33 h70 r90
  text "3V3" at 2224.7,1967.95 h70
  text "GND" at 2224.7,1869.13 h70
  text "5V" at 2294.67,1770.3 h70
  text "+" at 584.32,1711 h70
  text "GND" at 2224.7,1671.48 h70
  text "17" at 2305.52,1570 h70
  text "16" at 2306.34,1473.83 h70
  text "5V" at 559.52,1200 h50
  text "9V" at 781.35,1200 h50
  text "D & E EN GUATE / TESLA LAB / UNIVERSIDAD GALILEO / A. ISIDRO" at 941.63,905 h40
Bottom Overlay:
  drawing of 6 lines, arcs and shapes, not listed
  text "1" at 532,2744.67 h50 r270
  text "BOMBA" at 608,2586.39 h50 r270
  text "BATT- EXT" at 2420,2495.22 h50 r90
  text "5V - 9V" at 2495,2440.3 h50 r90
  text "2" at 526,2336.34 h50 r270
  text "BOMBA" at 606,2236.37 h50 r270
  text "LUZ UV" at 550,1780.37 h50 r270